# Altium PCB ReefingCutterV5.PcbDoc
Units mil, origin at the board's own origin, x right, y up, seen from the top; angles counter-clockwise.
Board outline 1000 x 2500 mil, 2 copper layers (Top Layer, Bottom Layer); 20 components, 14 nets, 83 pads, 6 vias.
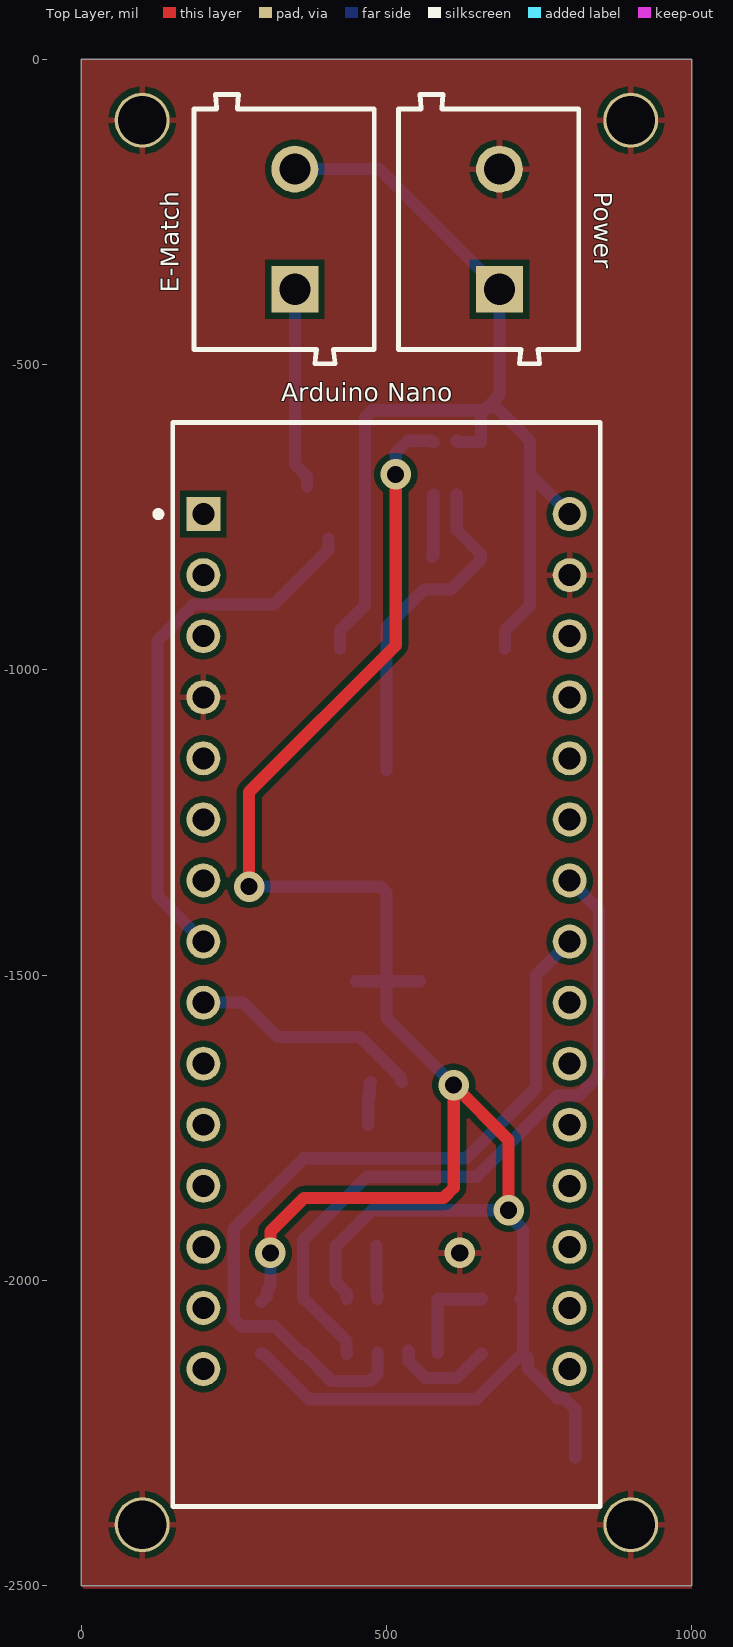
[diagram p0: Top Layer view]
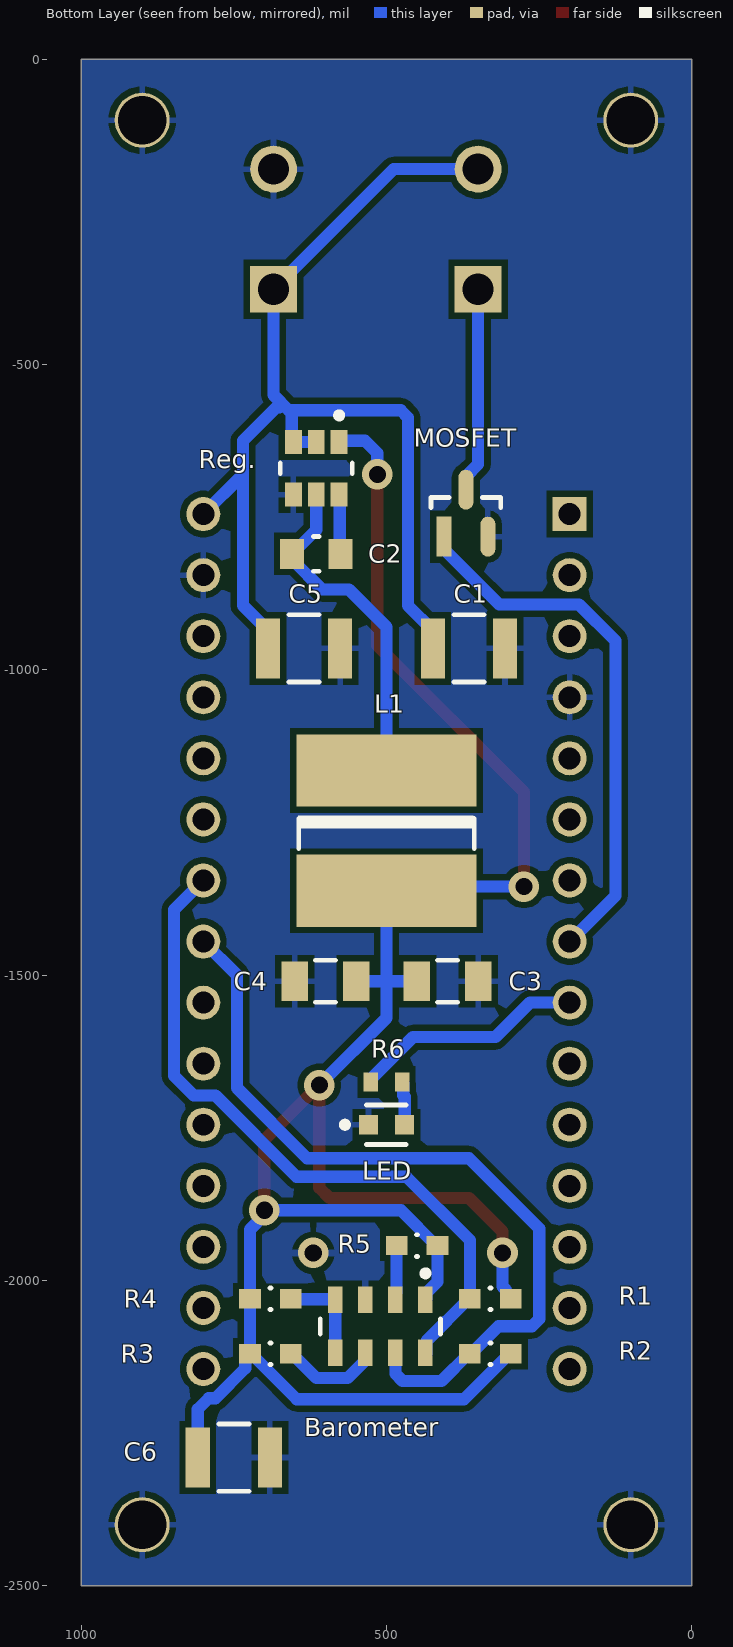
[diagram p1: Bottom Layer view, seen from below]
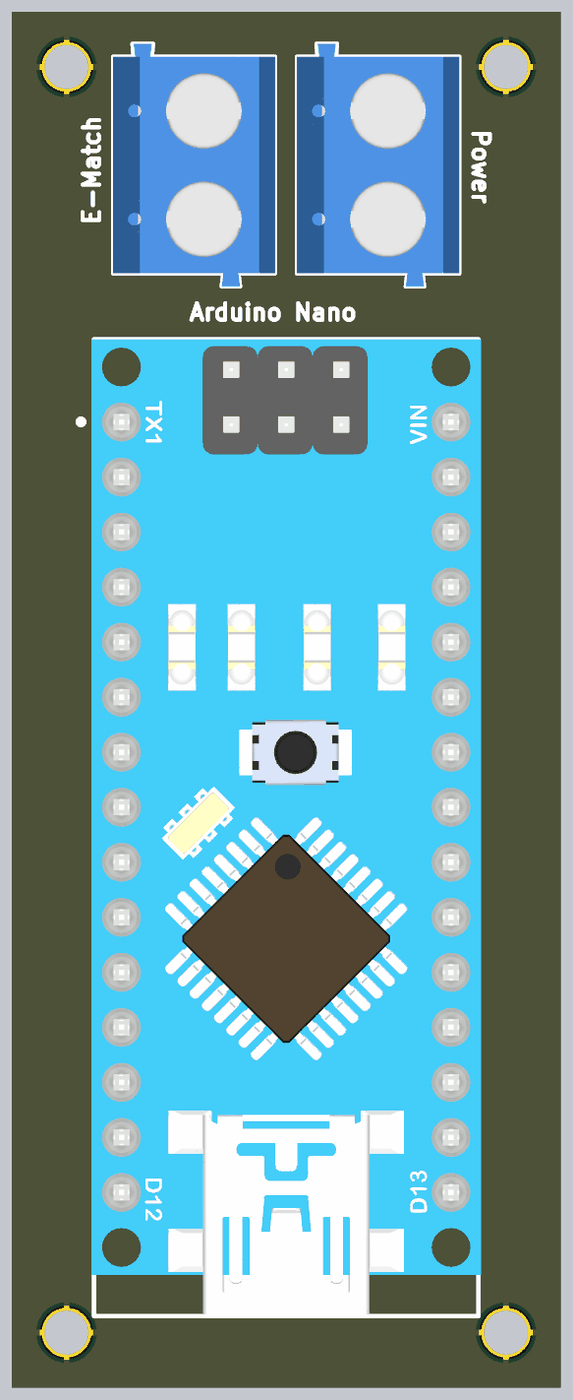
[diagram p2: 3D render of the assembled board from above, using the file's embedded part models]
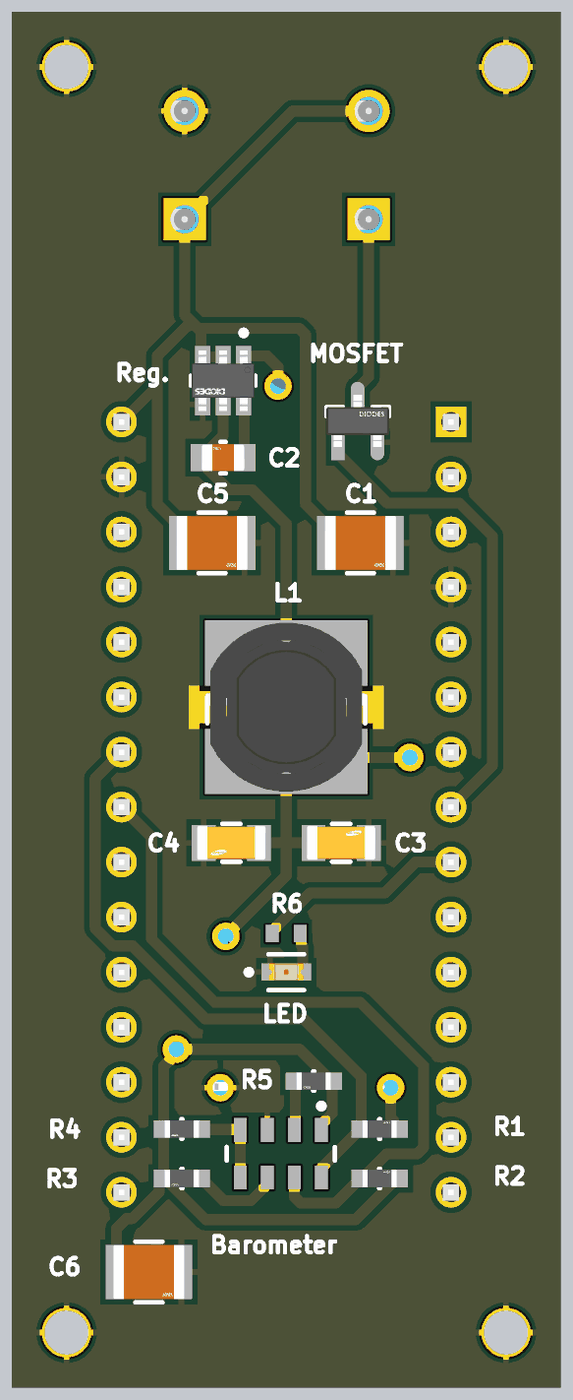
[diagram p3: 3D render of the assembled board from below, using the file's embedded part models]

## Layer stack, top to bottom
Top Solder: solder mask 0.4, Solder Resist, Dk 3.5
Top Layer: signal copper 1.4
Dielectric 1: dielectric 12.6, FR-4, Dk 4.8
Bottom Layer: signal copper 1.4
Bottom Solder: solder mask 0.4, Solder Resist, Dk 3.5

## Board outline
0,0 1000,0 1000,-2090 1000,-2500 0,-2500

## Design rules (kind name [scope] priority, off if disabled: settings)
Clearance [All] p1: gap=10 ignorepadtopadclearanceinfootprint=FALSE except(0: Arc-Hole Track-Hole SMDPad-Hole THPad-Hole Via-Hole Fill-Hole Poly-Hole Region-Hole Text-Hole)
PolygonConnect [All] p1: connectstyle=Relief reliefconductorwidth=10 reliefentries=4 polygonreliefangle="90 Angle" airgapwidth=10
RoutingVias [All] p1: holewidth=28 width=50 viastyle="Through Hole" minholewidth=28 minwidth=50 maxholewidth=28 maxwidth=50
SolderMaskExpansion [All] p1: expansion=4 istentingtop=FALSE
Width [All] p1: maxlimit=50 minlimit=10 preferedwidth=20 minimp=50.000000 maximp=50.000000 favimp=50.000000
30 further rules are at their usual default settings.

## Components (designator, comment, footprint, x,y, rotation, side; value= is the part's Value field where it differs from the comment)
"Arduino Nano" "A000005" FP-A000005-MFG 500,-1482.5 r0 top
Barometer "MS560702BA03-50" TECO-MS560702BA03-50_V 510,-2075 r270 bottom
C1 "12103C106KAT2A" FP-1210-L_3_3_0_4-W_2_5_0-MFG 365,-965 r180 bottom
C2 "08055C104JAT2A" FP-0805-L_2_01_0_2-W_1_25-MFG 615,-810 r0 bottom
C3 "CL31B226MPHNNNE" FP-CL31-IPC_C 400,-1510 r180 bottom
C4 "CL31B226MPHNNNE" FP-CL31-IPC_C 600,-1510 r0 bottom
C5 "12103C106KAT2A" FP-1210-L_3_3_0_4-W_2_5_0-MFG 635,-965 r180 bottom
C6 "12103C106KAT2A" FP-1210-L_3_3_0_4-W_2_5_0-MFG 750,-2290 r180 bottom
E-Match "691102710002" 691102710002 332.28,-278.43 r90 top (schematic designator "E-Match Connector")
L1 "744787039" "WE-PD2SR 7850" 500,-1263.43 r270 bottom
LED "LTST-C190KRKT" FP-LTST-C190KRKT-MFG 500,-1745 r180 bottom (schematic designator LED?)
MOSFET "DNBT8105-7" FP-SOT23-IPC_A 370,-743.45 r90 bottom (schematic designator "E-Match MOSFET")
Power "691102710002" 691102710002 667.28,-278.43 r90 top (schematic designator "Battery Connector")
R1 "RC0603FR-0747KL" FP-RC0603FR-0747KL-MFG 330,-2030 r180 bottom
R2 "RC0603FR-0747KL" FP-RC0603FR-0747KL-MFG 330,-2120 r180 bottom
R3 "RC0603FR-0747KL" FP-RC0603FR-0747KL-MFG 690,-2120 r0 bottom
R4 "RC0603FR-0747KL" FP-RC0603FR-0747KL-MFG 690,-2030 r0 bottom
R5 "RC0603FR-0747KL" FP-RC0603FR-0747KL-MFG 450,-1942.94 r0 bottom
R6 "RC0603JR-07220RL" RESC1608X55X25LL10T15 500,-1675 r180 bottom
Reg. "AP63203WU-7" FP-TSOT26-MFG 615,-670 r270 bottom (schematic designator "Voltage Reg.")

## Footprints (in the part's own frame and the unit in brackets; to place one, negate y for a bottom-side part, rotate by r counter-clockwise, add the part's x,y. Pads: shape width x height; smd on the part's side, far side on the other; paste and mask are expansions set on the pad)
691102710002 [mm] "5,00mm - modular - blue - Horizontal entry with pressure clamp - 9,9 mm height - 02p"
  rect 1.95x1.95 hole 1.3: 1(-2.5,-0.45)
  round 1.95 hole 1.3: 2(2.5,-0.45)
  silkscreen extent -5.6,-3.75 5.6,3.75, body extent -5.6,-3.75 5.6,3.75, height 9.96
FP-0805-L_2_01_0_2-W_1_25-MFG [mm]
  rect 1x1.25 smd paste+0 mask+0: 1(-1,0) 2(1,0)
  silkscreen extent -0.13,-0.73 0.13,0.73, body extent -1,-0.63 1,0.63, height 0.94
FP-1210-L_3_3_0_4-W_2_5_0-MFG [mm]
  rect 1x2.5 smd paste+0 mask+0: 1(-1.5,0) 2(1.5,0)
  silkscreen extent -0.62,-1.4 0.62,1.4, body extent -1.65,-1.25 1.65,1.25, height 2.79
FP-A000005-MFG [mil]
  rect 55.67x55.67 hole 35.98 paste-39370.1 mask+0: 1(-300,737.5)
  round 55.67 hole 35.98 paste-39370.1 mask+0: 2(-300,637.5) 3(-300,537.5) 4(-300,437.5) 5(-300,337.5) 6(-300,237.5) 7(-300,137.5) 8(-300,37.5) 9(-300,-62.5) 10(-300,-162.5) 11(-300,-262.5) 12(-300,-362.5) 13(-300,-462.5) 14(-300,-562.5) 15(-300,-662.5) 16(300,-662.5) 17(300,-562.5) 18(300,-462.5) 19(300,-362.5) 20(300,-262.5) 21(300,-162.5) 22(300,-62.5) 23(300,37.5) 24(300,137.5) 25(300,237.5) 26(300,337.5) 27(300,437.5) 28(300,537.5) 29(300,637.5) 30(300,737.5)
  silkscreen extent -379,-888 350,888, body extent -354,-891 354,891, height 10
FP-CL31-IPC_C [mil]
  rect 43.52x65.28 smd paste+0 mask+0: 1(-50.25,0) 2(50.25,0)
  silkscreen extent -17,-34 17,34, body extent -63,-31 63,31, height 55
FP-LTST-C190KRKT-MFG [mm]
  rect 0.8x0.8 smd paste+0 mask+0: 1(-0.75,0) 2(0.75,0)
  silkscreen extent -1.86,-0.82 0.82,0.82, body extent -0.8,-0.4 0.8,0.4, height 0.9
FP-RC0603FR-0747KL-MFG [mm]
  rect 0.9x0.8 smd paste+0 mask+0: 1(-0.85,0) 2(0.85,0)
  silkscreen extent -0.02,-0.45 0.02,0.45, body extent -0.8,-0.4 0.8,0.4, height 0.55
FP-SOT23-IPC_A [mm]
  rect 1.659x0.627 smd paste+0 mask+0: 1(-0.977,0.915)
  rrect100% 1.659x0.627 smd paste+0 mask+0: 2(-0.977,-0.915) 3(0.977,0)
  silkscreen extent 0.23,-1.45 0.65,1.45, body extent -1.2,-1.45 1.2,1.45, height 1.1
FP-TSOT26-MFG [mm]
  rect 1x0.7 smd paste+0 mask+0: 1(-1.1,0.95) 2(-1.1,0) 3(-1.1,-0.95) 4(1.1,-0.95) 5(1.1,0) 6(1.1,0.95)
  silkscreen extent -2.32,-1.5 0.22,1.5, body extent -1.4,-1.45 1.4,1.45, height 1
RESC1608X55X25LL10T15 [mm] "Chip Resistor, 2-Leads, Body 1.60x0.80mm, IPC High Density"
  rect 0.6x0.8 smd: 1(-0.65,0) 2(0.65,0)
  body extent -0.85,-0.45 0.85,0.45, height 0.55
TECO-MS560702BA03-50_V [mm] "SMD, 8-Leads, Body 3x5mm, Pitch 1.25mm"
  rect 1.1x0.6 smd: 1(-1.1,1.875) 2(-1.1,0.625) 3(-1.1,-0.625) 4(-1.1,-1.875) 5(1.1,-1.875) 6(1.1,-0.625) 7(1.1,0.625) 8(1.1,1.875)
  silkscreen extent -2.32,-2.5 0.32,2.5, body extent -1.5,-2.5 1.5,2.5, height 1
"WE-PD2SR 7850" [mm] "Chip Inductor, 2-Leads, Body 7.8x7.0mm, IPC Medium Density"
  rect 3x7.5 smd: 1(-2.5,0) 2(2.5,0)
  silkscreen extent -0.64,-3.68 0.75,3.65, body extent -3.9,-3.5 3.9,3.5, height 5

## Part data
"Arduino Nano": library part CMP-189986-000002-1, "ARDUINO NANO ATMEGA328 EVAL BRD", Manufacturer=TDK, Manufacturer Part Number=C3216X6S2A106K160AC, Operating Supply Voltage=12V, Package Quantity=50, Supplier Part Number=810-C3216X6S2A106K16, Category="Ceramic Capacitors", Core Architecture=AVR, Data Bus Width=8b, Evaluation Kit=Yes, Height=0.25inch, Interface=I2C, Length=7inch, Number of Bits=8, Packaging=Bulk, Pricing="1=1.33000, 10=1.05000, 50=1.05000, 100=0.78800, 500=0.59500, 1000=0.56600, 2000=0.56500, 4000=0.54500, 10000=0.51500 (USD)", REACH SVHC="No SVHC", RoHS=Yes, Series="AVR® ATmega", Stock=26512, Supplier=Mouser, Weight=0.358383oz, Width=5inch
Barometer: library part CMP-2000-07512-1, "Barometric Pressure Sensor, with Stainless Steel Cap , 1.8 to 3.6 V, -40 to 85 degC, 8-Pin SMD, RoHS, Tape and Reel", Manufacturer="TE Connectivity", Package Description="8-Pin Surface Mount Device, Body 3 x 5 mm, Pitch 1.25 mm", Datasheet URL=http://www.te.com/commerce/DocumentDelivery/DDEController?Action=showdoc&DocId=Data+Sheet%7FMS5607-02BA03%7FB2%7Fpdf%7FEnglish%7FENG_DS_MS5607-02BA03_B2.pdf%7FMS560702BA03-50, Datasheet Version=06/2017, Lead Free=LeadFree, Manufacturer URL=http://www.te.com/, Mounting Technology=SurfaceMount, Package Reference=MS560702BA03-50, RoHSCompliant=false
C1 C5 C6: library part CMP-04427-000091-1, "General Purpose Ceramic Capacitor, 1210, 10uF, 10%, X7R, 15%, 25V", Capacitance=10uF, Case Code (Imperial)=1210, Case Code (Metric)=3225, Dielectric=X7R, Max Operating Temperature=125°C, Min Operating Temperature=-55°C, Package Quantity=1, Tolerance=10%, Voltage=25V, Case/Package=1210, Construction=Flat, Contact Plating=Tin, Depth=2.5mm, Height=2.79mm, Lead Free="Lead Free", Length=3.2mm, Mount="Surface Mount", Packaging="Tape and Reel", Radiation Hardening=No, REACH SVHC="No SVHC", RoHS Compliant=Yes, Series=-, Termination=SMD/SMT, Thickness=0.11inch, Voltage Rating=25V, Voltage Rating (DC)=25V, Width=0.098inch
C2: library part CMP-2000-05808-2, "General Purpose Ceramic Capacitor, 0805, 100nF, 5%, X7R, 0.15, 50V", Capacitance=100nF, Case Code (Imperial)=0805, Case Code (Metric)=2012, Dielectric=X7R, Dielectric Material=Ceramic, Insulation Resistance=100GR, Max Operating Temperature=125°C, Min Operating Temperature=-55°C, Package Quantity=1, Tolerance=5%, Voltage=50V, Case/Package=0805, Contact Plating=Tin, Depth=1.25mm, Dissipation Factor=2.5%, Height=0.94mm, Lead Free="Lead Free", Length=2.01mm, Mount="Surface Mount", Number of Pins=2, Packaging="Tape and Reel", Radiation Hardening=No, REACH SVHC="No SVHC", RoHS Compliant=Yes, Termination=SMD/SMT, Thickness=0.037inch, Voltage Rating=50V, Voltage Rating (DC)=50V, Width=0.049inch
C3 C4: library part CMP-13271-004071-1, "Cap Ceramic 22uF 10V X7R ±20% SMD 1206 +125°C Embossed T/R", Capacitance=22uF, Case Code (Imperial)=1206, Case Code (Metric)=3216, Max Operating Temperature=125°C, Min Operating Temperature=-55°C, Package Quantity=1, Tolerance=20%, Voltage Rating=10V, Case/Package=1206, Lead Free="Lead Free", Length=0.126inch, Mount="Surface Mount", Packaging="Tape and Reel", Thickness=0.071inch, Voltage Rating (DC)=10V, Width=0.063inch
E-Match Power: library part CMP-1502-03258-1, "Series 102 - 5.00 mm Horizontal Entry Modular with Pressure Clamp WR-TBL, 2 pin", Manufacturer="Wurth Elektronik", Operating Temperature=-40to105degC, Datasheet URL=http://katalog.we-online.de/em/datasheet/6911027100xx.pdf, Manufacturer URL=http://www.we-online.de, Mounting Technology=THT, Package Reference=691102710002, Packaging=Box, Part Number=691102710002, Pin Number=2, Pitch=5.00mm, Publisher=WurthElektronik
L1: library part CMP-1397-00011-1, "Shielded Power Inductor WE-PD2SR, L=3.9 µH", Inductance="3.9 ÂµH", Manufacturer="Wuerth Elektronik", ComponentLink1Description="Manufacturer URL", ComponentLink1URL=http://www.we-online.com, ComponentLink2Description=Datasheet, ComponentLink2URL=http://www.we-online.de/katalog/media/pdf/744787039.pdf, PackageReference="WE-PD2SR 7850", PartNumber=744787039
LED: library part CMP-1674-00011-2, "LED RED CLEAR CHIP SMD", Case Code (Imperial)=0603, Case Code (Metric)=1608, Color=Red, Forward Current=30mA, Forward Voltage=2.4V, Lens Color=Colorless, Max Operating Temperature=85°C, Min Operating Temperature=-55°C, Package Quantity=1, Power Dissipation=75mW, Reverse Voltage=5V, Test Current=20mA, Case/Package=0603, Depth=0.8mm, Dominant Wavelength=631nm, Height=0.8mm, Illumination Color=Red, Lead Free="Lead Free", Length=1.6mm, Lens Style=Diffused, Lens Transparency=Clear, Luminous Intensity=54mcd, Mount="Surface Mount", Number of Elements=1, Number of LEDs=1, Number of Pins=2, Packaging="Tape and Reel", Power Rating=75mW, Radiation Hardening=No, Viewing Angle=130°, Wavelength=639nm, Width=0.8mm
MOSFET: library part CMP-12798-000033-1, "TRANS NPN 60V 1A SOT23-3", Case/Package=SOT-23, Collector Base Voltage (VCBO)=80V, Collector Emitter Breakdown Voltage=60V, Collector Emitter Saturation Voltage=500mV, Current Rating=1A, Emitter Base Voltage (VEBO)=5V, Frequency=150MHz, Max Operating Temperature=150°C, Max Power Dissipation=600mW, Min Operating Temperature=-55°C, Package Quantity=3000, Power Dissipation=300mW, Collector Emitter Voltage (VCEO)=60V, Contact Plating=Tin, Element Configuration=Single, Gain Bandwidth Product=150MHz, Height=1mm, hFE Min=30, Lead Free="Lead Free", Length=2.9mm, Max Breakdown Voltage=60V, Max Collector Current=1A, Mount="Surface Mount", Number of Elements=1, Number of Pins=3, Number of Terminals=3, Packaging="Tape and Reel", Polarity=NPN, Radiation Hardening=No, REACH SVHC="No SVHC", Transition Frequency=150MHz, Voltage Rating (DC)=60V, Weight=0.000282oz, Width=1.3mm
R1 R2 R3 R4 R5: library part CMP-1659-00055-2, "RES SMD 47K OHM 1% 1/10W 0603", Case Code (Imperial)=0603, Case Code (Metric)=1608, Max Operating Temperature=155°C, Max Power Dissipation=100mW, Min Operating Temperature=-55°C, Package Quantity=1, Resistance=47kR, Resistance Tolerance=1%, Resistor Type="Thick Film", Temperature Coefficient=100ppm/°C, Voltage Rating=50V, Case/Package=0603, Construction=Rectangular, Depth=0.8mm, Features="Moisture Resistant", Height=0.022inch, Lead Free="Lead Free", Length=0.063inch, Military Standard=Not, Number of Pins=2, Number of Terminations=2, Packaging="Tape and Reel", Power Rating=100mW, RoHS Compliant=Yes, Series=RC, Size Code=0603, Technology="THICK FILM", Termination=SMD/SMT, Tolerance=1%, Voltage Rating (DC)=50V, Width=0.031inch
R6: library part CMP-1012-00058-2, "Chip Resistor, 220 Ohm, +/- 5%, 0.1 W, -55 to 155 degC, 0603 (1608 Metric), RoHS, Tape and Reel", Case Code - in=0603, Case Code - mm=1608, Manufacturer=Yageo, Operating Temperature Range=-55Cto+155C, Package Description="2-Pin Surface Mount Device, Body 1.6 x 0.8 mm", Power Rating=100mW, Resistance=220Ohms, Temperature Coefficient=100PPM/C, Tolerance=5%, Voltage Rating=50V, Datasheet URL=http://www.yageo.com/documents/recent/PYu-RC_Group_51_RoHS_L_7.pdf, Datasheet Version="Rev. 7, 05/2017", Manufacturer URL=http://www.yageo.com/, Mounting Technology=SurfaceMount, Package Reference=0603, Packaging=Reel, Product=ThickFilmResistorsGeneralPurpose, Series=RC, Termination Style=SMD/SMT
Reg.: library part CMP-12757-000006-1, "IC REG BUCK 3.3V 2A TSOT26", Ambient Temperature Range High=+85°C, Ambient Temperature Range Low=-40°C, Manufacturer="Diodes Inc.", Max Junction Temp=+160°C, Max Supply Voltage=32V, Min Supply Voltage=3.8V, Nominal Supply Current=22uA, Output Current=2A, Output Voltage=3.3V, Package=TSOT26, Switching Frequency=1.1MHz, Temperature="to +160°C", Automotive=No, Category=IC, ComponentLink2Description=Datasheet, ComponentLink2URL=https://www.diodes.com/assets/Datasheets/AP63200-AP63201-AP63203-AP63205.pdf, Device Class L1="Integrated Circuits (ICs)", Device Class L2="Power Management ICs", Device Class L3="Voltage Regulators - Switching", Digikey Description="IC REG BUCK 3.3V 2A TSOT26", Footprint Url=https://www.diodes.com/assets/Package-Files/TSOT26.pdf, Height=1mm, Lead Free=Yes, Manufacturer Part Number=AP63203WU-7, Mouser Description="AP63203 Series 3.3 V 2 A SMT Fixed Low IQ Synchronous Buck - TSOT-26", Number Of Outputs=1, Octopart=https://octopart.com/ap63203wu-7-diodes+inc.-98099550, Output Type=Fixed, RoHS=TRUE, Standoff Height=0.01mm, Switching Topology=Buck, Temperature Range High=+160°C

## Free pads (board coordinates)
  round 90 hole 80: 9(100,-2400) 9(100,-100) 9(900,-2400) 9(900,-100)

## Via types
v1: diameter 50, hole 28, Top Layer to Bottom Layer, 6 vias

## Nets (pads, with @x,y where several pads share a name; then routed paths per layer and width w, separated by ;. In a path a pad name is that pad's centre, name@x,y a point inside that pad or via, vN(x,y) a via of type N, cw(c..) or ccw(c..) an arc to the next point about the centre after c; other vN are vias at no path point)
+3.3V: Barometer.1 C3.1 C4.1 C6.1 L1.2 R1.2 R2.2 R3.2 R4.2 R5.1 Reg..1 | length 3770.9
  Top Layer w20: v1@275,-1350 275,-1200 515,-960 v1(515,-680) ; v1@310,-1945 310,-1920 365,-1865 593.28,-1865 610,-1848.28 v1(610,-1680) 700,-1770 v1(700,-1885) v1@700,-1890
  Bottom Layer w20: v1(275,-1355) 490,-1355 500,-1365 500,-1510 ; R2.2@295,-2120 R2.2 298.5,-2120 373.11,-2194.61 646.89,-2194.61 R3.2@721.5,-2120 ; R1.2@295,-2035 304.25,-2025.75 304.25,-2015.75 310,-2010 v1(310,-1955) ; R5.1 416.53,-2002.2 435,-2020.67 Barometer.1@435,-2030 ; R5.1@417.52,-1943.93 476.45,-1885 v1(700,-1885) 700,-1893.12 723.46,-1916.58 723.46,-2026.54 720,-2030 723.46,-2033.46 R3.2 ; C3.1 500,-1510 ; v1@515,-675 515,-645 535,-625 573.82,-625 575.53,-626.71 Reg..1 ; C4.1@555,-1510 C4.1 500,-1510 ; v1(610,-1680) 500,-1570 500,-1510 ; R3.2@725,-2120 725.43,-2120 731.18,-2125.75 731.18,-2143.83 780.19,-2192.83 791.1,-2192.83 809.05,-2210.79 C6.1
D5: "Arduino Nano.8" MOSFET.1 | length 883.7
  Bottom Layer w20: 200,-1445 125,-1370 125,-952.35 184.52,-892.83 315.41,-892.83 405,-803.24 MOSFET.1@405,-785
GND: "Arduino Nano.4" "Arduino Nano.29" Barometer.3 C1.2 C3.2 C4.2 C5.2 C6.2 LED.1 MOSFET.2 pad.9 Power.2 Reg..4
  other v1: 620,-1955
"NetArduino Nano_9": "Arduino Nano.9" R6.1 | length 381.9
  Bottom Layer w20: 200,-1545 265,-1545 321.4,-1601.4 456.65,-1601.4 523.78,-1668.53 523.78,-1673.78 R6.1@525,-1675
NetBarometer_2: Barometer.2 R5.2 | length 87.7
  Bottom Layer w20: R5.2 483.46,-2019.92 485,-2021.46 Barometer.2@485,-2030
NetBarometer_4: Barometer.4 Barometer.5 R4.1 | length 161.2
  Bottom Layer w20: Barometer.5 Barometer.4 583.82,-2031.18 585,-2030 585,-2030.22 585.63,-2030.85 655.69,-2030.85 R4.1
NetBarometer_6: Barometer.6 R3.1 | length 166.2
  Bottom Layer w20: Barometer.6@535,-2115 536.42,-2116.42 536.42,-2132.66 563.72,-2159.96 614.61,-2159.96 654.57,-2120 R3.1
NetC2_1: C2.1 Reg..6 | length 102.8
  Bottom Layer w20: C2.1@575,-815 576.61,-813.39 576.61,-714.27 Reg..6
NetC2_2: C2.2 L1.1 Reg..5 | length 553.9
  Bottom Layer w20: L1.1 500,-930 561.45,-868.55 605.74,-868.55 654.37,-819.92 C2.2@654.37,-815 ; Reg..5 615,-770.71 C2.2@655,-810.71
"NetE-Match Connector_1": E-Match.1 MOSFET.3 | length 331.4
  Bottom Layer w20: E-Match.1 350,-663.42 370,-683.42 MOSFET.3@370,-700
NetLED_2: LED.2 R6.2 | length 71.8
  Bottom Layer w20: LED.2@470,-1745 470,-1699.25 472.6,-1696.65 472.6,-1676.81 R6.2
SCL: "Arduino Nano.24" Barometer.8 R1.1 | length 1152.1
  Bottom Layer w20: Barometer.8@435,-2120 434.37,-2119.37 434.37,-2098.94 365.43,-2030 R1.1 363.46,-1934.26 467.73,-1830 647.35,-1830 780.19,-1697.17 815.48,-1697.17 847.83,-1664.81 847.83,-1392.83 800,-1345
SDA: "Arduino Nano.23" Barometer.7 R2.1 | length 1316.2
  Bottom Layer w20: R2.1 361.5,-2120 316.5,-2075 261.72,-2075 250,-2063.28 250,-1915 365,-1800 630,-1800 745,-1685 745,-1500 800,-1445 ; R2.1@365.43,-2120 410.04,-2164.61 473.68,-2164.61 485.39,-2152.89 Barometer.7
VBAT: "Arduino Nano.30" C1.1 C5.1 E-Match.2 Power.1 Reg..2 Reg..3 | length 1840.8
  Bottom Layer w20: E-Match.2@355,-185 360,-180 488.15,-180 Power.1 685,-550 660,-575 ; C1.1 424.05,-935.47 465,-894.53 465,-586.72 476.72,-575 660,-575 ; Reg..2@615,-625 616.71,-626.71 Reg..3 ; Reg..3@655,-626.71 655,-580 660,-575 ; 675,-570 680,-570 735,-625 735,-680 ; C5.1 694.05,-935.47 735,-894.53 735,-680 ; 800,-745 735,-680
pads on no net: "Arduino Nano.1" "Arduino Nano.2" "Arduino Nano.3" "Arduino Nano.5" "Arduino Nano.6" "Arduino Nano.7" "Arduino Nano.10" "Arduino Nano.11" "Arduino Nano.12" "Arduino Nano.13" "Arduino Nano.14" "Arduino Nano.15" "Arduino Nano.16" "Arduino Nano.17" "Arduino Nano.18" "Arduino Nano.19" "Arduino Nano.20" "Arduino Nano.21" "Arduino Nano.22" "Arduino Nano.25" "Arduino Nano.26" "Arduino Nano.27" "Arduino Nano.28"

## Polygon pours and split planes (outlines as drawn)
GND on Top Layer "GND_L01_P001" (solid, pour order 1): 0,0 1000,0 1000,-2505 5,-2505 0,-2500
GND on Bottom Layer "GND_L02_P000" (solid, remove dead copper, pour order 0): 0,0 1000,0 1000,-2500 0,-2500